# EAGLE board CheckBatteryVoltage12VoltsWithReset(old) (EAGLE 9.5.2)
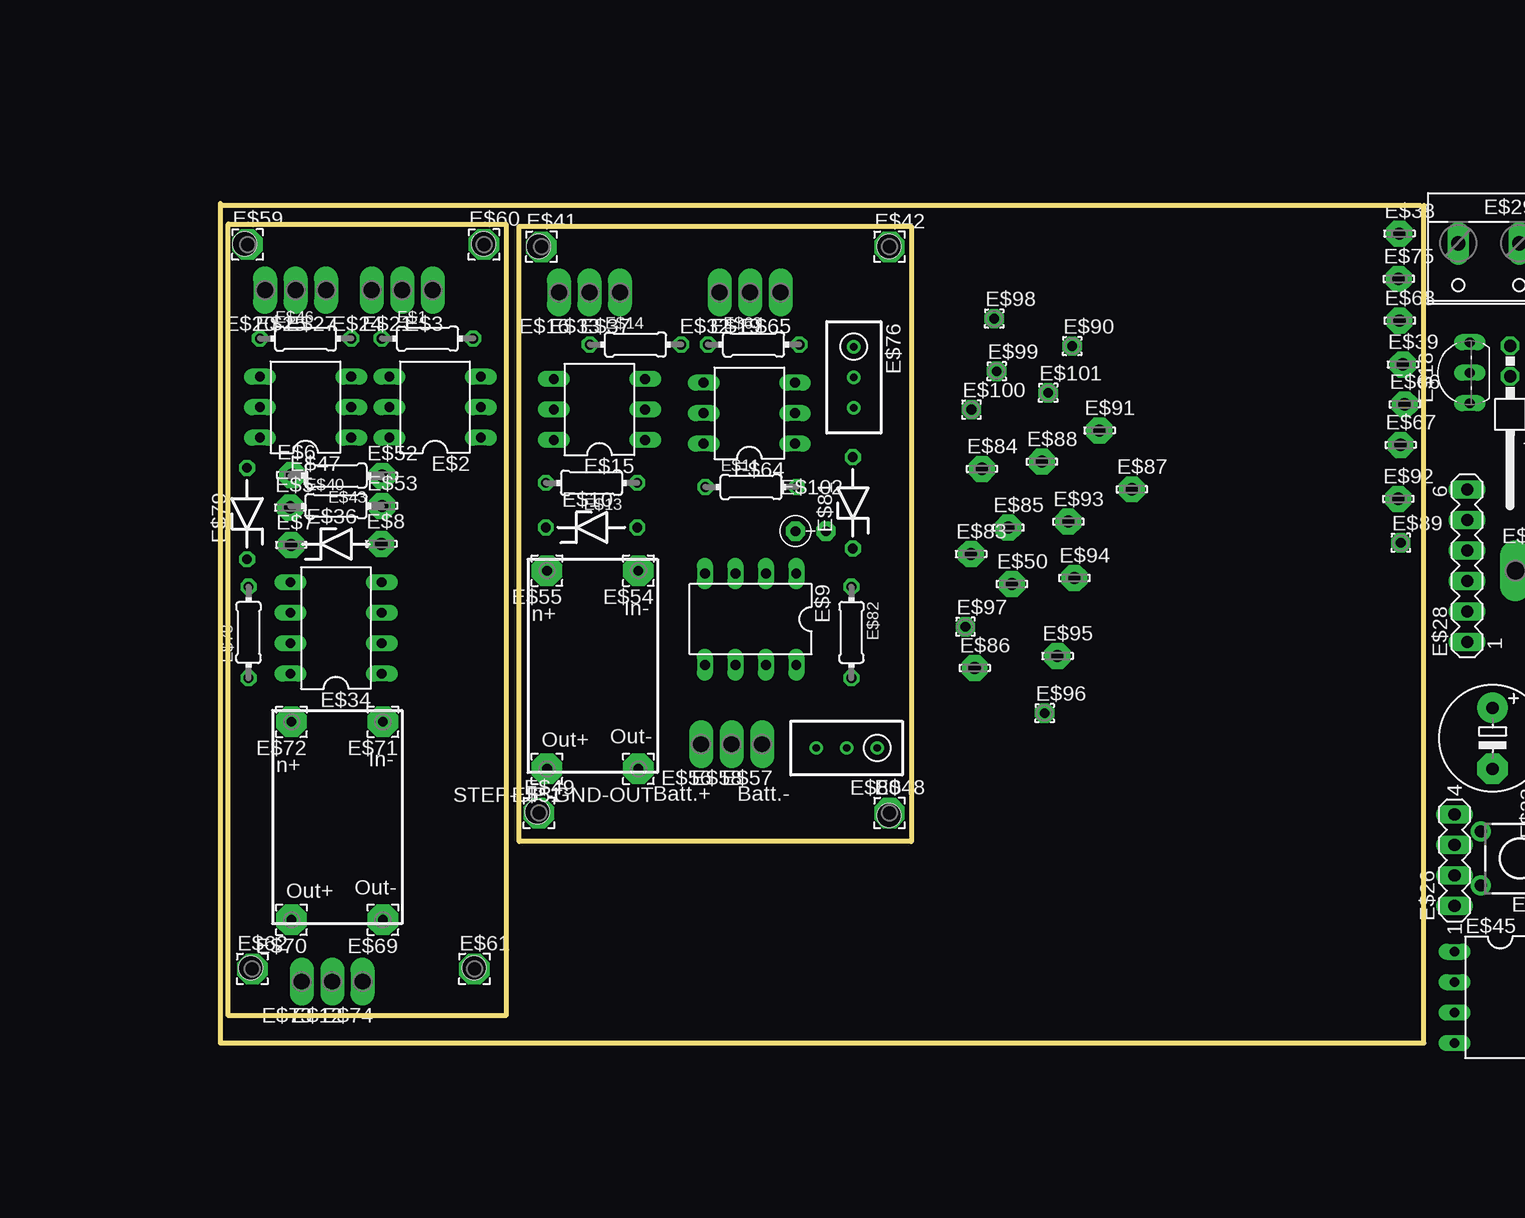
[diagram p0: board, top side]
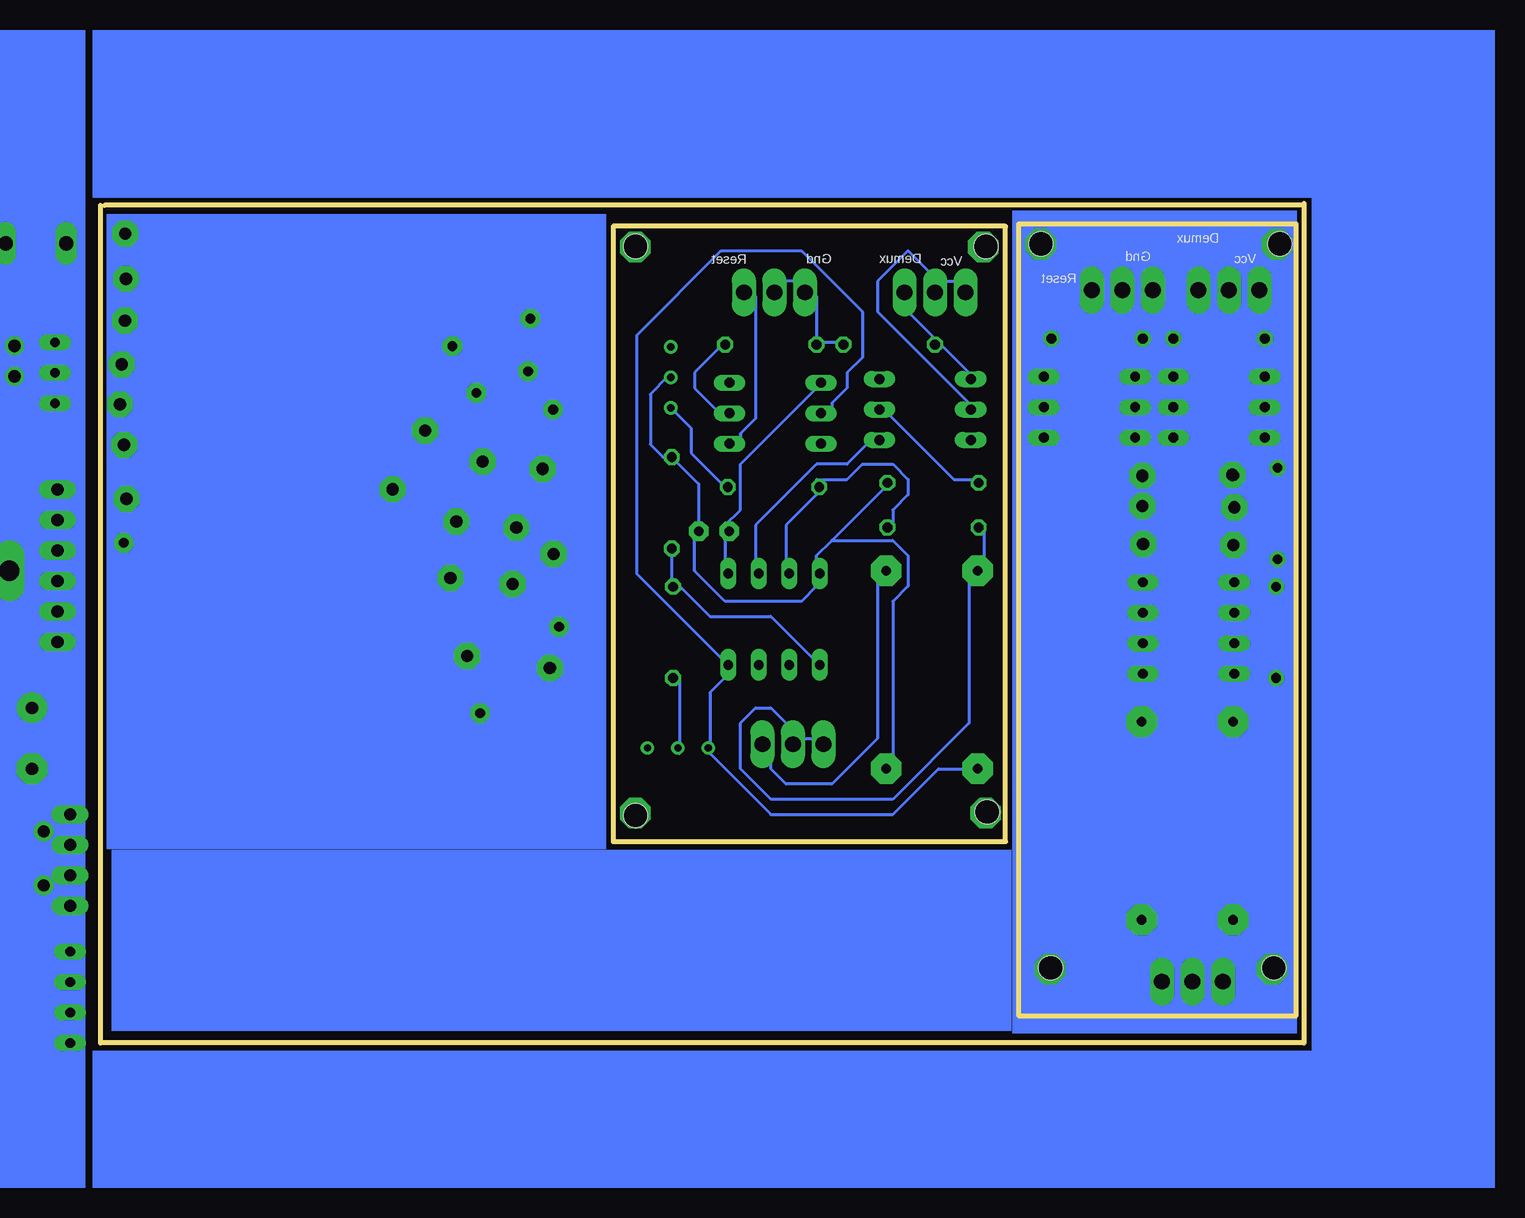
[diagram p1: board, bottom side, seen from below]

Size 100.33 x 70 mm. Coordinates in mm from the lower left corner, seen from the top.
Outline: 0,69.85 0,0 100.33,0 100.33,69.85
Outline: 0,69.85 0,70
Outline: 0,69.85 100,69.85
Outline: 0.66,68.28 23.8,68.28 23.8,2.27 0.66,2.27 0.66,68.28
Outline: 24.9,68.1 57.6,68.1 57.6,16.8 24.9,16.8 24.9,68.1
Copper layers (1*16): Top 0.035mm / dielectric 1.5mm / Bottom 0.035mm
Design rules "default": minimum track width 10mil, minimum drill 24mil, track to track 8mil, track to pad 8mil, pad to pad 8mil, via to via 8mil, smd to smd 8mil, copper to edge 40mil, drill to drill 8mil, minimum pad ring 10mil, minimum via ring 8mil, stop-mask expansion 4mil, vias tented up to drill 0mil, thermal gap 10mil
Holes 2 mm at 2.52,6.26 21.14,6.26 21.93,66.62 2.02,66.62 26.41,19.27 55.73,18.96 55.73,66.42 26.52,66.42

## Footprints (pad centres in the part's own frame; a part is rotated, then mirrored left to right if it is on the bottom)
0204/7 = drill 0.813 octagon: 1 -3.81,0; 2 3.81,0
DIL06 = drill 0.813 long: 1 -2.54,-3.81; 2 0,-3.81; 3 2.54,-3.81; 4 2.54,3.81; 5 0,3.81; 6 -2.54,3.81
P1-13Y = drill 1.321 pad 1.905 long: TP 0,0
TL1105 = drill 1 pad 1.676: 1 -2.25,3.25; 2 2.25,3.25; 3 -2.25,-3.25; 4 2.25,-3.25
LSP10 = drill 1.016 pad 2.159 octagon: MP 0,0
DIL08 = drill 0.813 long: 1 -3.81,-3.81; 2 -1.27,-3.81; 3 1.27,-3.81; 4 3.81,-3.81; 5 3.81,3.81; 6 1.27,3.81; 7 -1.27,3.81; 8 -3.81,3.81
ZDIO-7.5 = drill 0.813 octagon: A 3.81,0; C -3.81,0
TO92- = drill 0.813 long: 1 2.54,0; 2 0,0; 3 -2.54,0
1X01/90 = drill 1.016 long: 1 -1.27,-3.81
E5-8,5 = drill 1.016 pad 2.54: + -2.54,0 | drill 1.016 pad 2.54 octagon: - 2.54,0
MA04-1 = drill 1.016 long: 1 -3.81,0; 2 -1.27,0; 3 1.27,0; 4 3.81,0
MA06-1 = drill 1.016 long: 1 -6.35,0; 2 -3.81,0; 3 -1.27,0; 4 1.27,0; 5 3.81,0; 6 6.35,0
W237-132 = drill 1.194 long: 1 -2.54,-0.635; 2 2.54,-0.635
RS-2,5 = drill 0.813 pad 1.6 octagon: 1 -1.27,0; 2 1.27,0
2X02/90 = drill 1.016 octagon: 1 -1.27,-6.35; 2 -1.27,-3.81; 3 1.27,-6.35; 4 1.27,-3.81
2,54/0,8 = drill 0.813 pad 2.54 octagon: 1 0,0
P1-17Y = drill 1.702 pad 2.121 long: TP 0,0
RTRIM3296W = drill 0.61: 1 0,-2.54; 2 0,0; 3 0,2.54
1,6/0,8 = drill 0.813 pad 1.6 octagon: 1 0,0

## Placement (x,y rotation side)
E$1  220  [0204/7]  17.25,58.73 0 top
E$2  Til113  [DIL06]  17.89,53.02 90 top
E$3  [P1-13Y]  17.7,62.77 180 top
E$4  [TL1105]  108.32,15.38 90 top  (outside the outline)
E$5  [LSP10]  5.82,44.65 0 top
E$6  [LSP10]  5.97,47.37 0 top
E$7  [LSP10]  5.89,41.52 0 top
E$8  [LSP10]  13.41,41.6 0 top
E$9  Attiny85  [DIL08]  44.2,35.34 180 top
E$10  zener 10v  [ZDIO-7.5]  30.93,42.98 0 top
E$11  680  [0204/7]  44.23,46.36 0 top
E$12  [P1-13Y]  9.31,5.12 180 top
E$13  220  [0204/7]  30.93,46.7 180 top
E$14  220  [0204/7]  34.59,58.23 0 top
E$15  Til113  [DIL06]  31.59,52.81 90 top
E$16  [P1-13Y]  28.23,62.58 180 top
E$17  [0204/7]  113.03,25.4 90 top  (outside the outline)
E$18  [TO92-]  104.14,55.88 90 top  (outside the outline)
E$19  [P1-13Y]  44.16,62.58 180 top
E$20  [P1-13Y]  3.73,62.77 180 top
E$21  [P1-13Y]  15.15,62.77 180 top
E$22  [1X01/90]  112.39,40.01 180 top  (outside the outline)
E$23  [E5-8,5]  106.05,25.4 270 top  (outside the outline)
E$24  [P1-13Y]  12.62,62.77 180 top
E$25  [P1-13Y]  6.26,62.77 180 top
E$26  [MA04-1]  102.87,15.24 90 top
E$27  [P1-13Y]  8.8,62.77 180 top
E$28  [MA06-1]  103.93,39.79 90 top  (outside the outline)
E$29  [W237-132]  105.73,66.04 180 top
E$30  [RS-2,5]  113.03,50.8 90 top  (outside the outline)
E$31  [2X02/90]  108.78,51.77 180 top  (outside the outline)
E$32  [P1-13Y]  41.62,62.58 180 top
E$33  [P1-13Y]  30.77,62.58 180 top
E$34  Attiny85  [DIL08]  9.63,34.6 90 top
E$35  [MA04-1]  114.3,13.34 90 top  (outside the outline)
E$36  zener 12v  [ZDIO-7.5]  9.63,41.59 0 top
E$37  [P1-13Y]  33.3,62.58 180 top
E$38  [LSP10]  98.28,67.48 0 top
E$39  [LSP10]  98.58,56.58 0 top
E$40  1k  [0204/7]  9.63,44.76 0 top
E$41  [2,54/0,8]  26.75,66.38 0 top
E$42  [2,54/0,8]  55.77,66.38 0 top
E$43  220  [0204/7]  9.63,47.3 180 top
E$44  [P1-17Y]  107.95,39.37 0 top  (outside the outline)
E$45  [DIL08]  106.68,3.81 270 top
E$46  220  [0204/7]  7.09,58.73 0 top
E$47  Til113  [DIL06]  7.09,53.02 90 top
E$48  [2,54/0,8]  55.77,19.18 0 top
E$49  [2,54/0,8]  26.55,19.18 0 top
E$50  [LSP10]  65.97,38.27 0 top
E$51  [2,54/0,8]  27.22,22.87 180 top
E$52  [LSP10]  13.47,47.28 0 top
E$53  [LSP10]  13.47,44.77 0 top
E$54  [2,54/0,8]  34.84,39.38 180 top
E$55  [2,54/0,8]  27.22,39.38 180 top
E$56  [P1-13Y]  40.07,24.92 180 top
E$57  [P1-13Y]  45.15,24.92 180 top
E$58  [P1-13Y]  42.61,24.92 180 top
E$59  [2,54/0,8]  2.25,66.58 0 top
E$60  [2,54/0,8]  21.97,66.58 0 top
E$61  [2,54/0,8]  21.17,6.17 0 top
E$62  [2,54/0,8]  2.65,6.17 0 top
E$63  220  [0204/7]  44.45,58.23 0 top
E$64  Til113  [DIL06]  44.09,52.52 90 top
E$65  [P1-13Y]  46.7,62.58 180 top
E$66  [LSP10]  98.72,53.24 0 top
E$67  [LSP10]  98.38,49.87 0 top
E$68  [LSP10]  98.3,60.23 0 top
E$69  [2,54/0,8]  13.54,10.27 180 top
E$70  [2,54/0,8]  5.92,10.27 180 top
E$71  [2,54/0,8]  13.54,26.78 180 top
E$72  [2,54/0,8]  5.92,26.78 180 top
E$73  [P1-13Y]  6.77,5.12 180 top
E$74  [P1-13Y]  11.85,5.12 180 top
E$75  [LSP10]  98.22,63.7 0 top
E$76  W203  [RTRIM3296W]  52.8,55.5 180 top
E$77  zener 12v  [ZDIO-7.5]  111.48,36.87 270 top  (outside the outline)
E$78  1k  [0204/7]  2.34,34.23 90 top
E$79  zener 12v  [ZDIO-7.5]  2.21,44.13 90 top
E$80  w501  [RTRIM3296W]  52.2,24.6 90 top
E$81  zener 4.3v  [ZDIO-7.5]  52.72,45.03 90 top
E$82  100  [0204/7]  52.6,34.23 270 top
E$83  [LSP10]  62.58,40.77 0 top
E$84  [LSP10]  63.48,47.87 0 top
E$85  [LSP10]  65.67,42.97 0 top
E$86  [LSP10]  62.88,31.27 0 top
E$87  [LSP10]  75.97,46.16 0 top
E$88  [LSP10]  68.47,48.47 0 top
E$89  [1,6/0,8]  98.4,41.7 0 top
E$90  [1,6/0,8]  71,58.1 0 top
E$91  [LSP10]  73.28,51.06 0 top
E$92  [LSP10]  98.17,45.37 0 top
E$93  [LSP10]  70.67,43.47 0 top
E$94  [LSP10]  71.17,38.77 0 top
E$95  [LSP10]  69.78,32.27 0 top
E$96  [1,6/0,8]  68.7,27.5 0 top
E$97  [1,6/0,8]  62.1,34.7 0 top
E$98  [1,6/0,8]  64.5,60.4 0 top
E$99  [1,6/0,8]  64.7,56 0 top
E$100  [1,6/0,8]  62.6,52.8 0 top
E$101  [1,6/0,8]  69,54.2 0 top
E$102  [RS-2,5]  49.2,42.67 0 top
STEP-UP-GND-OUT  [2,54/0,8]  34.84,22.87 180 top

## Library data of the parts
E$1 E$11 E$13 E$14 E$17 E$40 E$43 E$46 E$63 E$78 E$82 = eagle-ltspice
E$2 E$15 E$47 E$64 = ic-package
E$3 E$12 E$16 E$19-E$21 E$24 E$25 E$27 E$32 E$33 E$37 E$44 E$56-E$58 E$65 E$73 E$74 = testpad
E$4 = switch
E$5-E$8 E$38 E$39 E$50 E$52 E$53 E$66-E$68 E$75 E$83-E$88 E$91-E$95 = solpad
E$9 E$34 E$45 = 74xx-us
E$10 E$23 E$36 E$77 E$79 E$81 = ref-packages-longpad
E$18 = transistor-fet
E$22 E$31 = pinhead
E$26 E$28 E$35 = con-lstb
E$29 = con-wago-508
E$30 E$102 = discrete
E$41 E$42 E$48 E$49 E$51 E$54 E$55 E$59-E$62 E$69-E$72 E$89 E$90 E$96-E$101 STEP-UP-GND-OUT = wirepad
E$76 E$80 = rcl

## Nets
0V: E$71.1 E$74.TP
5.1V-STEP-UP: E$9.8 E$51.1 E$64.5 E$80.3
12V: E$12.TP E$36.C E$72.1 E$73.TP
B+: E$34.8 E$70.1
B-: E$2.5 E$34.4 E$40.2 E$43.1 E$69.1
IN-5V-FROM-NANO-SDCARD: E$15.5 E$16.TP E$33.TP
IN-12V-BATTERY: E$10.C E$55.1 E$56.TP E$58.TP
IN-GND-BATTERY: E$54.1 E$57.TP
IN-GND-NANO-SD-CARD: E$14.2 E$19.TP E$32.TP E$63.1
IN-TO-RESET-ATTINY85: E$64.1 E$65.TP
OUT-SERIAL-DATA: E$14.1 E$15.4 E$37.TP
PHOTO-DIODE: E$13.2 E$15.2
S$2: E$2.4 E$34.1
S$3: E$2.1 E$3.TP
S$4: E$1.2 E$2.2
S$5: E$9.1 E$64.4 E$102.1
S$9: E$20.TP E$25.TP E$47.5
S$15: E$63.2 E$64.2
S$17: E$11.2 E$76.3
S$18: E$80.2 E$82.2
S$28: E$34.3 E$36.A E$40.1
S$32: E$1.1 E$21.TP E$24.TP E$46.2
S$40: E$34.2 E$47.1
S$41: E$43.2 E$47.2
S$44: E$27.TP E$46.1 E$47.4
STEP-UP-GND: E$9.4 E$13.1 E$76.2 E$81.A E$102.2 STEP-UP-GND-OUT.1
TX-SERIAL-DATA: E$9.2 E$15.1
VZ-ANALOG-REFERENCE: E$9.5 E$81.C E$82.1
VZ-BATTERY-LEVEL: E$9.3 E$10.A E$11.1

## Tracks (layer width: path | path; a pad name or v marks a point on that pad's centre or on a via)
0V
  Bottom 1.016: E$74.TP 11.25,5.72 11.25,24.61 13.35,26.71 E$71.1
5.1V-STEP-UP
  Bottom 0.254: 49.53,24.13 49.53,29.21 48.26,30.48 E$9.8 48.26,31.75 55.61,39.1 55.61,59.02 48.59,66.04 41.91,66.04 36.83,60.96 36.83,57.15 38.1,55.88 38.1,54.61 39.37,53.34 39.37,52.07 E$64.5 | 49.53,24.13 44.45,19.05 34.29,19.05 30.48,22.86 27.94,22.86 E$51.1 | 49.53,24.13 E$80.3
12V
  Bottom 1.016: 8.69,5.22 9.24,5.22 E$12.TP | 8.69,5.22 7.64,5.22 | 7.64,5.22 6.95,5.22 E$73.TP 7.64,5.22 | E$36.C 6.04,41.57 6.04,41.32 8.49,38.87 8.49,29.39 6.04,26.94 E$72.1 6.04,26.71 8.69,24.06 8.69,5.22
B+
  Bottom 1.016: E$34.8 4.36,30.79 2.41,28.84 2.41,13.88 5.81,10.48 E$70.1
B-
  Bottom 1.016: 14.88,38.41 15.84,39.37 15.84,43.92 15,44.76 E$40.2 13.49,44.79 13.49,47.08 E$43.1 13.49,47.78 16.4,47.73 16.4,50.66 14.79,52.97 E$2.5 | E$34.4 14.88,38.41 | E$69.1 13.58,10.48 13.58,19.85 16.43,22.7 16.43,29.07 11.4,29.07 10.36,30.12 10.36,33.83 11.11,34.58 15.15,34.58 15.48,34.9 15.48,37.86 14.88,38.41
IN-5V-FROM-NANO-SDCARD
  Bottom 0.254: 30.48,63.5 33.02,66.04 35.56,63.5 35.56,60.96 27.94,53.34 E$15.5 | 30.48,63.5 29.21,63.5 E$16.TP | 30.48,63.5 E$33.TP
IN-12V-BATTERY
  Bottom 0.254: E$56.TP 40.64,25.4 41.91,25.4 E$58.TP 43.18,25.4 43.18,26.67 44.45,27.94 45.72,27.94 46.99,26.67 46.99,22.86 44.45,20.32 34.29,20.32 27.94,26.67 27.94,39.37 E$55.1 26.67,39.37 26.67,43.18 E$10.C
IN-GND-BATTERY
  Bottom 0.254: E$57.TP 44.45,24.13 44.45,22.86 43.18,21.59 39.37,21.59 35.56,25.4 35.56,39.37 E$54.1
IN-GND-NANO-SD-CARD
  Bottom 0.254: 40.64,58.42 38.1,58.42 E$14.2 | 40.64,58.42 40.64,62.23 E$32.TP 41.91,63.5 43.18,63.5 E$19.TP | 40.64,58.42 E$63.1
IN-TO-RESET-ATTINY85
  Bottom 0.254: E$64.1 46.99,49.53 46.99,50.8 45.72,52.07 45.72,62.23 E$65.TP
OUT-SERIAL-DATA
  Bottom 0.254: 30.48,58.42 27.94,55.88 E$15.4 | 30.48,58.42 33.02,60.96 33.02,62.23 E$37.TP | 30.48,58.42 E$14.1
PHOTO-DIODE
  Bottom 0.254: E$13.2 26.67,46.99 29.21,46.99 35.56,53.34 E$15.2
S$2
  Bottom 1.016: E$34.1 13.49,30.86 19.45,32.7 19.52,50.92 16.05,55.58 E$2.4
S$3
  Bottom 1.016: E$2.1 21.49,50.52 21.49,50.98 18.06,55.06 18.03,62.76 E$3.TP
S$4
  Bottom 1.016: E$1.2 21.03,58.52 21.03,57.15 19.65,56.57 19.65,55.2 21.49,53.03 E$2.2
S$5
  Bottom 0.254: E$9.1 48.26,39.37 48.26,41.91 E$102.1 48.26,43.18 46.99,44.45 46.99,48.26 40.64,54.61 E$64.4
S$9
  Bottom 1.016: E$47.5 3.43,53.03 3.59,52.93 10.78,60.93 arc-3 10.73,64.3 arc-5 10.73,65.8 6.8,65.8 6.4,63.32 6.4,62.87 E$25.TP 6.17,62.87 3.89,62.87 E$20.TP
S$15
  Bottom 0.254: E$64.2 48.26,52.07 50.8,54.61 50.8,55.88 48.26,58.42 E$63.2
S$17
  Bottom 0.254: E$76.3 51.1,51.26 51.1,49.2 48.26,46.36 E$11.2
S$18
  Bottom 0.254: E$80.2 52.07,24.13 52.07,30.48 E$82.2
S$28
  Bottom 1.016: E$40.1 5.95,44.56 8.19,44.56 11.06,41.69 E$36.A 11.17,41.59 11.17,37.04 12.33,35.87 E$34.3
S$32
  Bottom 1.016: 12.67,62.83 E$24.TP | 12.57,58.75 13.26,58.75 E$1.1 | 12.57,58.75 10.97,58.75 E$46.2 | 12.57,58.75 12.57,62.64 E$24.TP | E$21.TP 15.09,62.87 12.8,62.87 E$24.TP
S$40
  Bottom 0.508: 7.47,45.98 4.53,45.98 4.08,46.74
  Bottom 1.016: 13.46,33.35 E$34.2 13.8,33.1 15.39,33.31 17.93,34.02 18.01,50.69 15.47,54.25 9.24,54.31 4.08,48.51 4.08,46.74 | 7.47,45.98 10.74,50.29 E$47.1
S$41
  Bottom 1.016: E$43.2 5.95,47.31 5.92,47.35 5.84,47.82 6.4,48.46 10.44,52.96 E$47.2
S$44
  Bottom 1.016: E$47.4 3.43,55.78 3.43,58.52 E$46.1 3.43,58.75 6.31,58.75 8.69,61.13 8.69,62.64 E$27.TP
STEP-UP-GND
  Bottom 0.254: 39.37,41.91 40.64,40.64 40.64,39.37 E$9.4 40.64,38.1 41.91,36.83 48.26,36.83 50.8,39.37 50.8,41.91 50.48,42.65 | 39.37,41.91 34.29,46.99 E$13.1 | 50.48,42.65 E$102.2 | 39.37,41.91 34.29,41.91 33.02,40.64 33.02,38.1 34.29,36.83 34.29,22.86 STEP-UP-GND-OUT.1 | E$76.2 53.1,55.5 54.5,54.1 54.5,49.9 53.45,48.84 E$81.A 50.48,46.61 50.48,42.65
TX-SERIAL-DATA
  Bottom 0.254: E$9.2 45.72,39.37 45.72,43.18 40.64,48.26 38.1,48.26 35.56,50.8 E$15.1
VZ-ANALOG-REFERENCE
  Bottom 0.254: E$9.5 40.64,31.75 44.45,35.56 49.53,35.56 52.07,38.1 E$82.1 52.72,38.16 E$81.C
VZ-BATTERY-LEVEL
  Bottom 0.254: E$10.A 34.29,43.18 34.29,44.45 33.02,45.72 33.02,46.99 34.29,48.26 36.83,48.26 38.1,46.99 40.64,46.99 E$11.1 40.64,45.72 43.18,43.18 43.18,39.37 E$9.3
(copper drawn outside any net)
  shapes: Bottom area x7

## Text on the board
tPlace: In+ | In- | Out+ | Out- | In+ | In- | Batt.+ | Batt.- | Out+ | Out-
bPlace: Demux | Vcc | Gnd | Vcc | Demux | Gnd | Reset | Reset